# Altium PCB Mach_7x10_New.PcbDoc
Units mm, origin at the board's own origin, x right, y up, seen from the top; angles counter-clockwise.
Board outline 95 x 65 mm, 2 copper layers (Top Layer, Bottom Layer); 31 components, 26 nets, 107 pads, 0 vias.
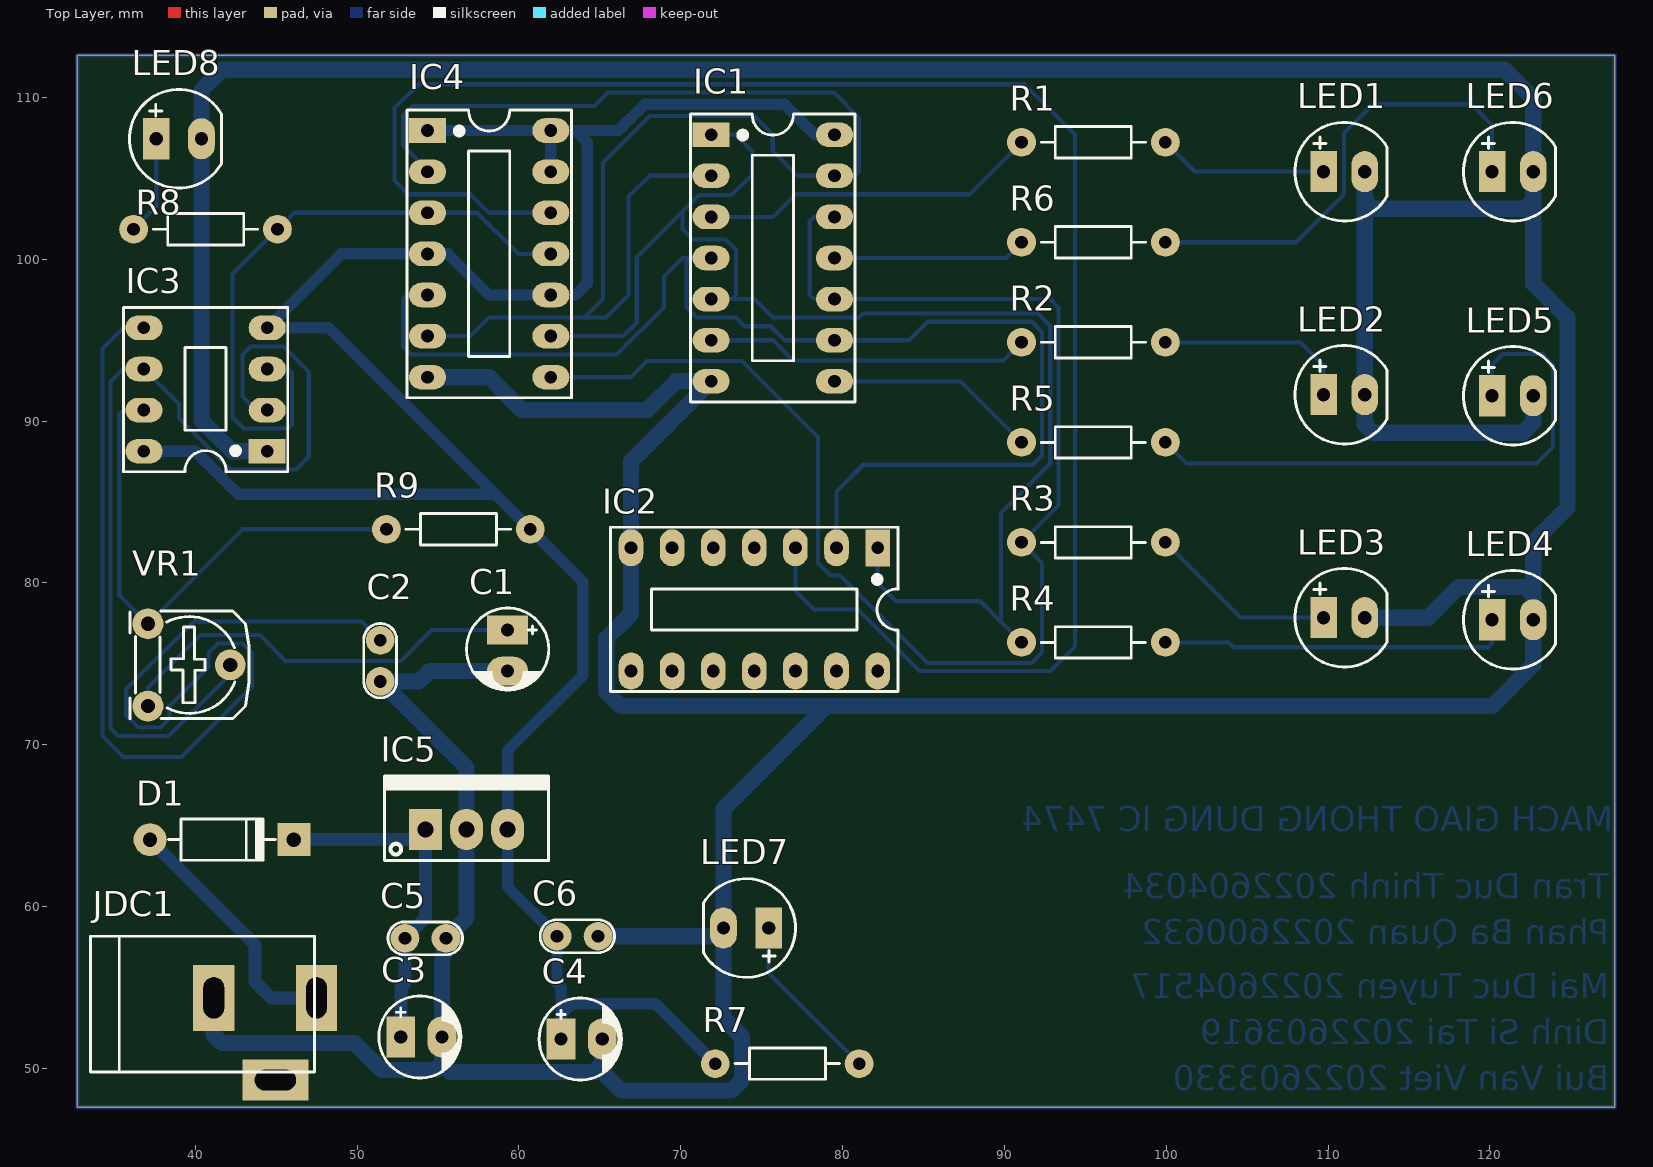
[diagram p0: Top Layer view]
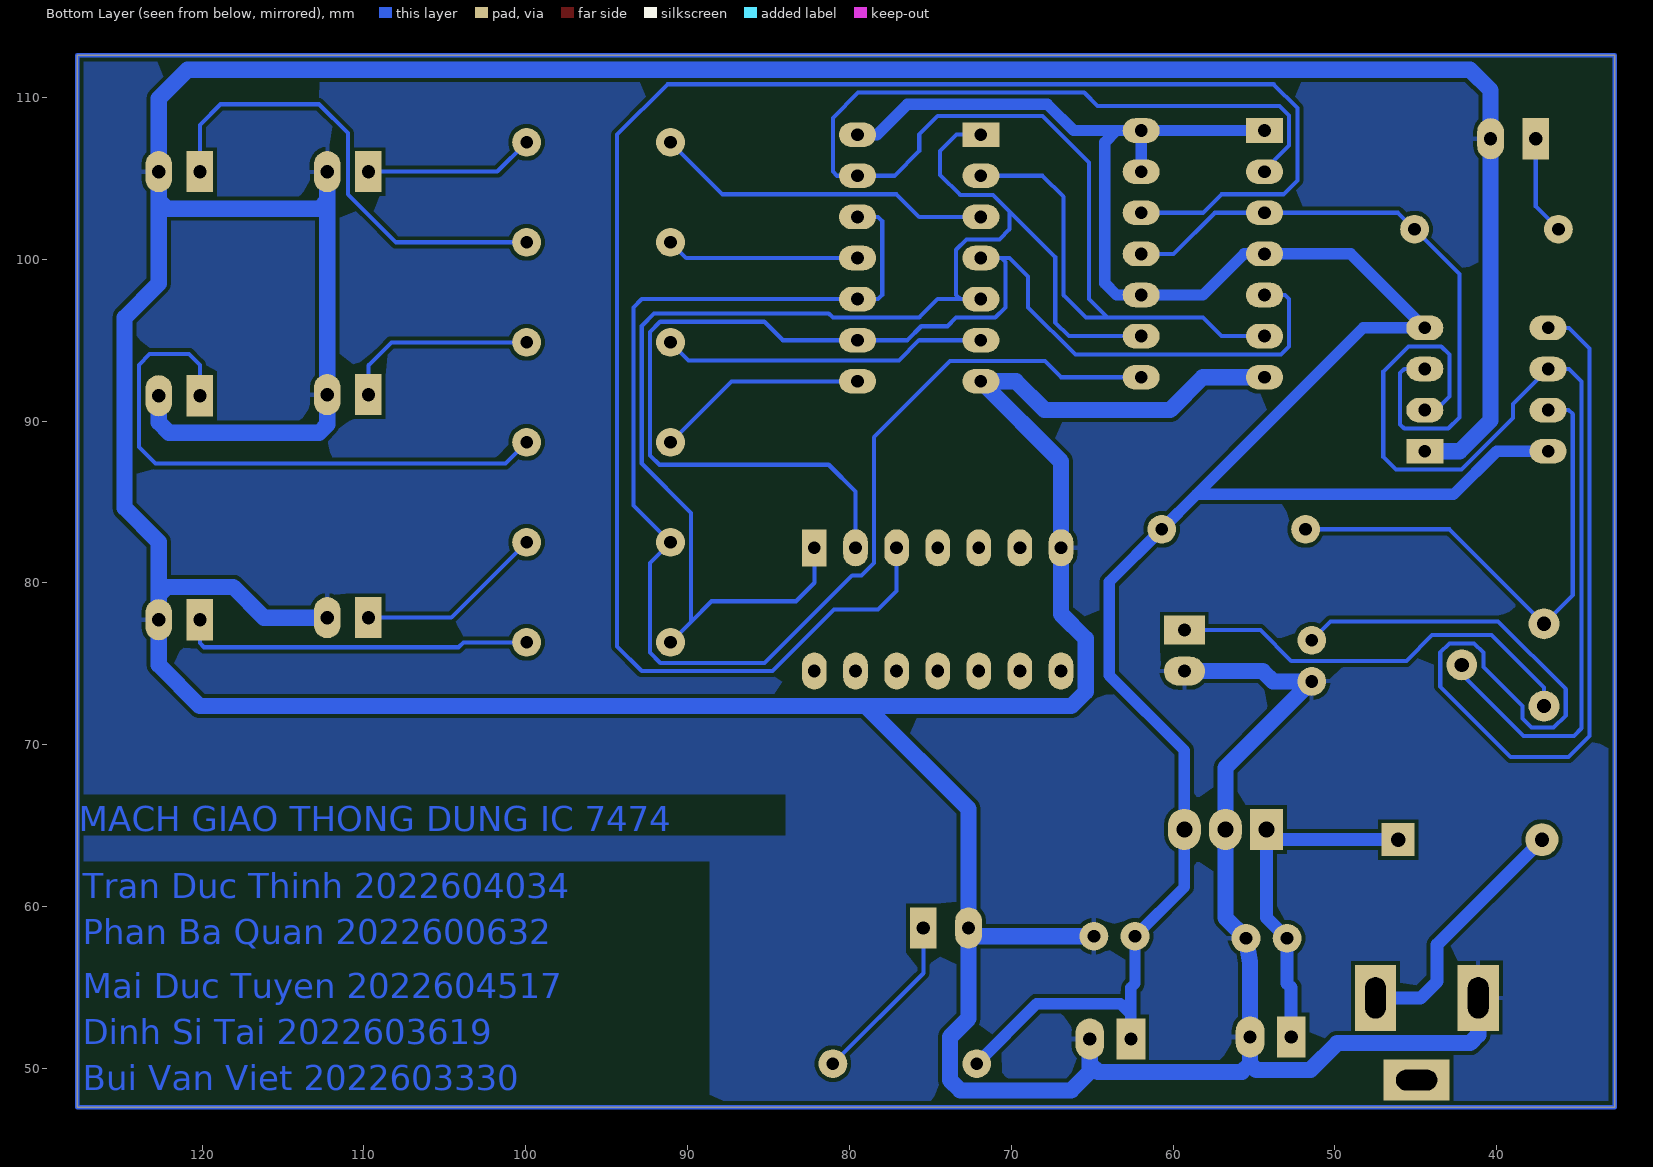
[diagram p1: Bottom Layer view, seen from below]
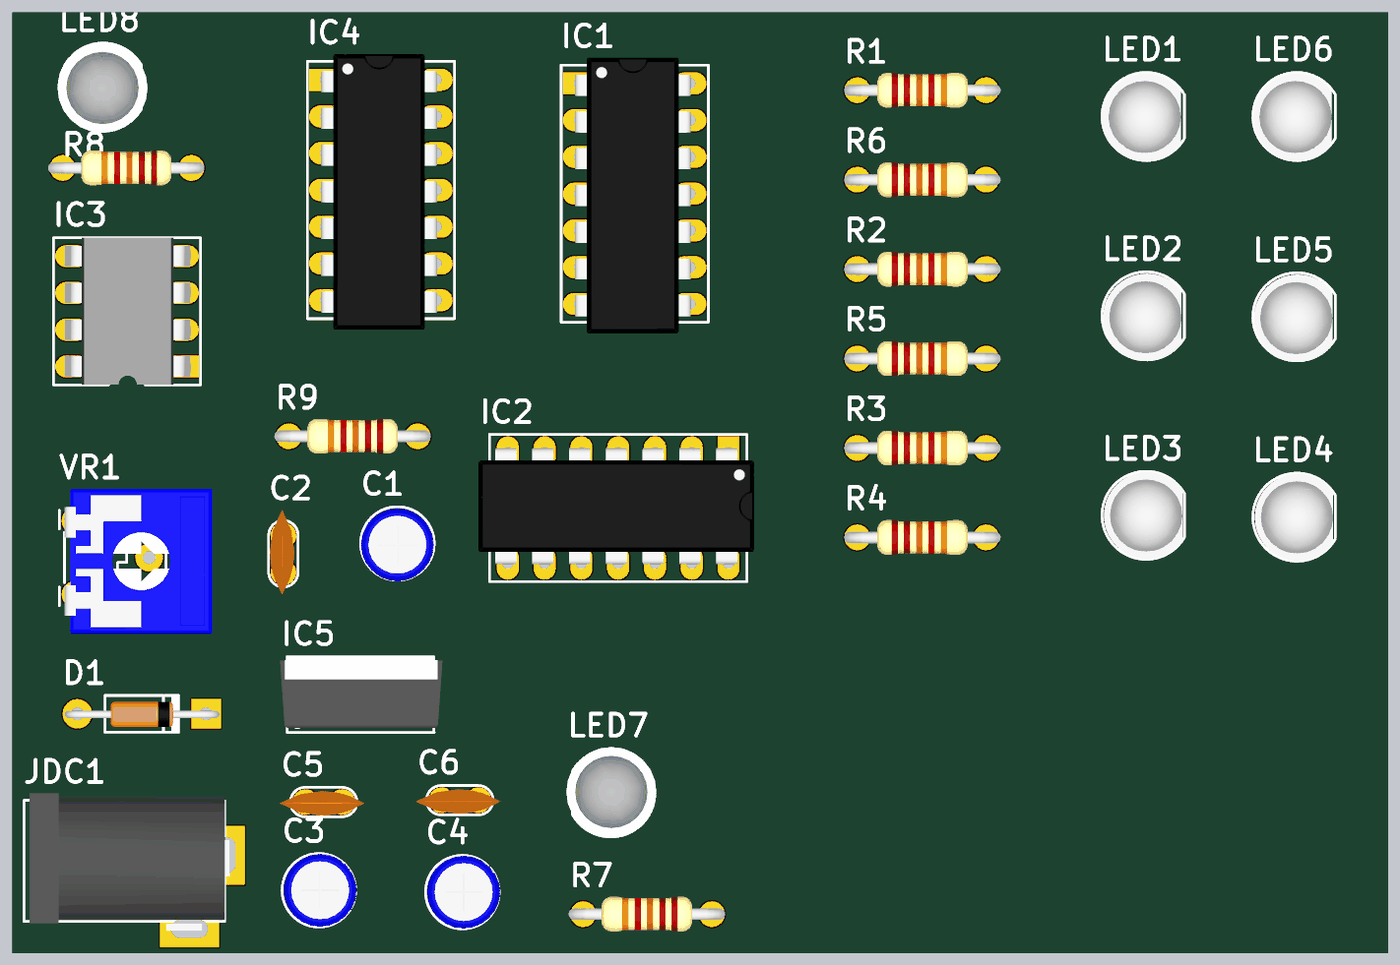
[diagram p2: 3D render of the assembled board from above, using the file's embedded part models]

## Layer stack, top to bottom
Top Solder: solder mask 0.0102, Solder Resist, Dk 3.5
Top Layer: signal copper 0.0356
Dielectric 1: dielectric 0.32, FR-4, Dk 4.8
Bottom Layer: signal copper 0.0356
Bottom Solder: solder mask 0.0102, Solder Resist, Dk 3.5

## Board outline
32.715,47.602 32.715,112.602 127.715,112.602 127.715,47.602

## Design rules (kind name [scope] priority, off if disabled: settings)
Clearance [All] p1: gap=0.254 ignorepadtopadclearanceinfootprint=FALSE
PolygonConnect [All] p1: connectstyle=Relief reliefconductorwidth=0.254 reliefentries=4 polygonreliefangle="90 Angle" airgapwidth=0.254
RoutingLayers [All] p1: top layer_v5=FALSE bottom layer_v5=TRUE
RoutingVias [All] p1: holewidth=0.711 width=1.27 viastyle="Through Hole" minholewidth=0.711 minwidth=1.27 maxholewidth=0.711 maxwidth=1.27
SolderMaskExpansion [All] p1: expansion=0.102 istentingtop=FALSE
SupplyNets "Schematic Supply Nets_2" [InNet('VCC')] p1: voltage=0.000
SupplyNets "Schematic Supply Nets_1" [InNet('+12')] p2: voltage=0.000
SupplyNets "Schematic Supply Nets" [InNet('GND')] p3: voltage=0.000
Width GND [InNet('GND')] p1: maxlimit=1 minlimit=1 preferedwidth=1
Width 12 [InNet('NetC3_1')] p2: maxlimit=0.8 minlimit=0.8 preferedwidth=0.8
Width 12V [InNet('+12')] p3: maxlimit=0.8 minlimit=0.8 preferedwidth=0.8
Width VCC [InNet('VCC')] p4: maxlimit=0.7 minlimit=0.7 preferedwidth=0.7
Width NET [All] p5: maxlimit=0.254 minlimit=0.254 preferedwidth=0.254
29 further rules are at their usual default settings.

## Classes and differential pairs
component class Nguyen_Ly: C1 C2 C3 C4 C5 C6 D1 IC1 IC2 IC3 IC4 IC5 JDC1 LED1 LED2 LED3 LED4 LED5 LED7 R1 R2 R3 R4 R5 R8 VR1

## Components (designator, comment, footprint, x,y, rotation, side; value= is the part's Value field where it differs from the comment)
C1 "10uF" CP1/2 59.309,77.089 r270 top value=10uF/50V
C2 "100pF" CN1 51.435,73.914 r90 top
C3 "10uF" CP1/2 52.705,51.943 r0 top value=10uF/50V
C4 "10uF" CP1/2 62.611,51.816 r0 top value=10uF/50V
C5 "100pF" CN1 55.499,58.039 r180 top
C6 "100pF" CN1 64.897,58.166 r180 top
D1 "1N4007" D1A 37.211,64.135 r180 top
IC1 "7408" DIP14/W0.3 71.882,107.696 r270 top
IC2 "7486" DIP14/W0.3 82.169,82.169 r180 top
IC3 "LM555" DIP8/W0.3 44.45,88.138 r90 top
IC4 "74LS74" DIP14/W0.3 54.356,107.95 r270 top
IC5 "LM7805" QTO-220 54.229,64.77 r0 top
JDC1 "Jac DC" DC-IN 44.323,51.816 r0 top
LED1 "LED" LED-5-Green 109.728,105.41 r0 top value="LED 3 ly Single Colour"
LED2 "LED" LED-5-Yellow 109.728,91.63 r0 top value="LED 3 ly Single Colour"
LED3 "LED" LED-5-RED 109.728,77.851 r0 top value="LED 3 ly Single Colour"
LED4 "LED" LED-5-RED 120.142,77.724 r0 top value="LED 3 ly Single Colour"
LED5 "LED" LED-5-Yellow 120.142,91.567 r0 top value="LED 3 ly Single Colour"
LED6 "LED" LED-5-Green 120.142,105.41 r0 top value="LED 3 ly Single Colour"
LED7 "LED" LED-5-WHITE 74.041,58.674 r180 top value="LED 3 ly Single Colour"
LED8 "LED" LED-5-WHITE 38.989,107.442 r0 top value="LED 3 ly Single Colour"
R1 "1k" R1/4W 99.949,107.226 r180 top value="R1/4W - 1K"
R2 "1k" R1/4W 99.949,94.866 r180 top value="R1/4W - 1K"
R3 "1k" R1/4W 99.949,82.507 r180 top value="R1/4W - 1K"
R4 "1k" R1/4W 99.949,76.327 r180 top value="R1/4W - 1K"
R5 "1k" R1/4W 99.949,88.687 r180 top value="R1/4W - 1K"
R6 "1k" R1/4W 99.949,101.046 r180 top value="R1/4W - 1K"
R7 "1k" R1/4W 72.136,50.292 r0 top value="R1/4W - 1K"
R8 "1k" R1/4W 36.195,101.854 r0 top value="R1/4W - 1K"
R9 "1k" R1/4W 51.816,83.312 r0 top value="R1/4W - 1K"
VR1 "10K" VR 37.084,77.47 r270 top value="VR 10K"

## Footprints (in the part's own frame and the unit in brackets; to place one, negate y for a bottom-side part, rotate by r counter-clockwise, add the part's x,y. Pads: shape width x height; smd on the part's side, far side on the other; paste and mask are expansions set on the pad)
CN1 [mil]
  round 70 hole 31: 1(0,0) 2(100,0)
  silkscreen extent -40,-40 141,40, body extent -60,-30 170,37, height 265
CP1/2 [mil] "Tu hoa < 22uF/16>50V"
  rect 70x100 hole 32: 1(0,0)
  oval 70x100 hole 32: 2(100,0)
  silkscreen extent -53,-100 146,100, body extent -49,-99 149,99, height 287
D1A [mil] "Diode 1A, W 100mil, L 350mil"
  round 80 hole 35: 1(0,0)
  rect 80x80 hole 35: 2(-350,0)
  silkscreen extent -305,-50 -45,50, body extent -386,-33 34,36, height 84
DC-IN [mil] "Jac DC input"
  rect 100x160 hole 50 slot 100 at 90 deg: 1(125,100) 2(-125,100)
  rect 160x100 hole 50 slot 100 at 0 deg: 3(25,-100)
  silkscreen extent -425,-80 120,250, body extent -410,-105 134,269, height 434
DIP8/W0.3 [mil] "8 PIN, W 300mil, Pin to pin 100mil"
  rect 60x90 hole 31: 1(0,0)
  oval 60x90 hole 31: 2(100,0) 3(200,0) 4(300,0) 5(300,300) 6(200,300) 7(100,300) 8(0,300)
  silkscreen extent -50,-50 350,350, body extent -50,-40 350,336, height 201
DIP14/W0.3 [mil] "14PIN, W 300mil, Pin to pin 100mil"
  rect 60x90 hole 31: 1(0,0)
  oval 60x90 hole 31: 2(100,0) 3(200,0) 4(300,0) 5(400,0) 6(500,0) 7(600,0) 8(600,300) 9(500,300) 10(400,300) 11(300,300) 12(200,300) 13(100,300) 14(0,300)
  silkscreen extent -50,-50 650,350, body extent -70,-12 680,302, height 145
LED-5-Green [mil] "LED 2 PIN, 5 ly , Only colour,pin to pin 100mil"
  rect 65x100 hole 32: 1(0,0)
  oval 65x100 hole 32: 2(100,0)
  silkscreen extent -70,-120 154,120, body extent -69,-120 145,117, height 339
LED-5-RED [mil] "LED 2 PIN, 5 ly , Only colour,pin to pin 100mil"
  rect 65x100 hole 32: 1(0,0)
  oval 65x100 hole 32: 2(100,0)
  silkscreen extent -70,-120 154,120, body extent -65,-119 149,118, height 339
LED-5-WHITE [mil] "LED 2 PIN, 5 ly , Only colour, pin to pin 110mil"
  rect 65x100 hole 32: 1(-55,0)
  oval 65x100 hole 32: 2(55,0)
  silkscreen extent -120,-120 104,120, body extent -124,-125 121,120, height 340
LED-5-Yellow [mil] "LED 2 PIN, 5 ly , Only colour,pin to pin 100mil"
  rect 65x100 hole 32: 1(0,0)
  oval 65x100 hole 32: 2(100,0)
  silkscreen extent -70,-120 154,120, body extent -67,-122 147,115, height 339
QTO-220 [mil] "TO-220 - 1-2-3"
  rect 80x100 hole 39: 1(0,0)
  oval 80x100 hole 39: 2(100,0) 3(200,0)
  silkscreen extent -100,-76 300,130, body extent -119,-64 322,121, height 755
R1/4W [mil] "R 1/4W, 2 Pin, 350mil"
  round 70 hole 31: 1(0,0) 2(350,0)
  silkscreen extent 48,-38 302,38, body extent -40,-47 386,47, height 111
VR [mil] "Resistor Variable"
  round 75 hole 35: 1(0,0) 2(100,200) 3(200,0)
  silkscreen extent -31,-44 231,246, body extent -87,-30 307,372, height 165

## Part data
C1 C3 C4: library part CP1, "Cap P  0,1uF < 22uF , 16 - 50V", Description 1="10 => 220uF/6,3V/10V - 10uF => 100uF/16V", Description 2="0,1uF => 33uF/50V - 10uF => 22uF/63V", Description 3="0,47uF => 10uF/100V"
C2 C5 C6: library part CN1, "Cap np  1pF - 472pF"
D1: library part D1A, "Diode 1A"
IC1: "Quad 2-Input AND Gate"
IC2: "Quad 2-Input XOR Gate", Copyright by=VanDungEvn@Gmail.com
IC3: "Timer"
IC4: library part 7474, "Dual D Flip-Flop", Copyright by=VanDungEvn@Gmail.com
IC5: library part LM78xx, "On ap +, from + 5 to + 24VDC"
JDC1: library part DCIN, "Jac DC input"
LED1 LED2 LED3 LED4 LED5 LED6 LED7 LED8: "LED Single colour Green and Red"
R1 R2 R3 R4 R5 R6 R7 R8 R9: library part R1/4W, "Resistor 1/4W"
VR1: library part VR, "Var Resistor"

## Nets (pads, with @x,y where several pads share a name; then routed paths per layer and width w, separated by ;. In a path a pad name is that pad's centre, name@x,y a point inside that pad or via, vN(x,y) a via of type N, cw(c..) or ccw(c..) an arc to the next point about the centre after c; other vN are vias at no path point)
+12: D1.1 JDC1.1 | length 15.7
  Bottom Layer w0.8: D1.1 43.688,57.658 43.688,55.372 44.704,54.356 JDC1.1
GND: C1.2 C2.1 C3.2 C4.2 C5.1 C6.1 IC1.7 IC2.7 IC3.1 IC4.7 IC5.2 JDC1.2 LED1.2 LED2.2 LED3.2 LED4.2 LED5.2 LED6.2 LED7.2 LED8.2 | length 403.1
  Bottom Layer w1: JDC1.2 41.148,52.07 41.656,51.562 49.86,51.562 51.511,49.911 54.864,49.911 55.245,50.292 ; IC3.1 42.291,88.138 40.386,90.043 LED8.2 40.386,110.439 41.656,111.709 120.904,111.709 122.682,109.931 LED6.2 122.682,103.632 ; IC4.7 58.166,92.71 60.19,90.686 67.945,90.686 69.715,92.456 IC1.7 66.929,87.503 IC2.7 66.929,78.08 65.405,76.556 65.405,73.279 66.294,72.39 78.867,72.39 120.142,72.39 122.682,74.93 LED4.2 122.682,79.248 ; C1.2 54.467,74.549 53.832,73.914 C2.1 56.769,68.58 IC5.2 56.769,59.309 C5.1 55.245,56.54 C3.2 55.245,50.292 ; C6.1 LED7.2@72.644,58.166 ; C4.2 65.151,50.292 ; 78.867,72.263 72.644,66.04 LED7.2 LED7.2@72.644,58.166 ; LED3.2 116.18,77.851 118.085,79.756 122.174,79.756 122.682,79.248 ; LED1.2 112.268,103.632 ; LED5.2 122.682,89.916 122.047,89.281 112.776,89.281 112.268,89.789 LED2.2 112.268,103.632 ; 55.245,50.292 55.753,49.784 64.643,49.784 65.151,50.292 ; 65.151,50.292 65.151,49.784 66.294,48.641 73.152,48.641 73.787,49.276 73.787,51.943 72.644,53.086 LED7.2@72.644,58.166 ; 112.268,103.632 112.776,103.124 122.174,103.124 122.682,103.632 ; 122.682,79.248 122.682,82.525 124.79,84.633 124.79,96.393 122.682,98.501 122.682,103.632
NetC1_1: C1.1 VR1.3 | length 26.2
  Bottom Layer w0.254: VR1.3 37.084,73.533 40.322,76.772 44.005,76.772 45.593,75.184 52.705,75.184 54.61,77.089 C1.1
NetC2_2: C2.2 IC3.5 | length 71.7
  Bottom Layer w0.254: IC3.5 35.535,95.758 34.265,94.488 34.265,70.536 35.56,69.24 39.141,69.24 43.497,73.596 43.497,75.692 42.926,76.263 41.402,76.263 40.831,75.692 40.831,74.803 38.417,72.39 38.417,71.628 37.846,71.056 36.487,71.056 35.738,71.806 35.738,73.431 39.929,77.622 50.267,77.622 C2.2
NetC3_1: C3.1 C5.2 D1.2 IC5.1 | length 21.6
  Bottom Layer w0.8: D1.2 IC5.1@54.229,64.135 ; C3.1 52.705,54.991 52.959,55.245 C5.2 54.229,59.309 IC5.1@54.229,64.135 ; IC5.1 IC5.1@54.229,64.135
NetIC1_1: IC1.1 IC1.5 IC2.1 IC4.9 R4.2 | length 85.4
  Bottom Layer w0.254: IC4.9 66.446,95.25 67.288,96.091 67.288,100.13 70.104,102.946 ; IC1.5 73.152,97.536 ; IC1.1 73.152,107.696 73.381,107.696 74.397,106.68 74.397,105.207 73.152,103.962 72.72,103.962 71.12,103.962 70.104,102.946 ; IC2.1 82.169,80.01 83.312,78.867 88.519,78.867 89.789,77.597 ; R4.2 89.789,77.597 ; 70.104,102.946 70.104,101.854 70.739,101.219 72.771,101.219 73.406,100.584 73.406,97.79 73.152,97.536 ; 73.152,97.536 74.549,97.536 75.692,96.393 81.026,96.393 81.28,96.647 92.075,96.647 92.837,95.885 92.837,87.376 89.789,84.328 89.789,77.597
NetIC1_2: IC1.2 IC1.13 IC4.2 IC4.6 | length 91.4
  Bottom Layer w0.254: IC4.6 57.023,95.25 58.166,96.393 64.059,96.393 ; IC4.2 54.319,105.41 53.732,105.997 53.732,106.13 52.832,107.03 52.832,108.87 53.436,109.474 64.665,109.474 65.492,110.301 79.462,110.301 81.026,108.737 81.026,105.41 80.772,105.156 IC1.13 77.216,105.156 75.692,106.68 75.692,107.696 74.549,108.839 68.072,108.839 65.202,105.969 65.202,97.536 64.059,96.393 ; IC1.2 68.072,105.156 66.78,103.864 66.78,97.777 65.396,96.393 64.059,96.393
NetIC1_3: IC1.3 R1.2 | length 21.1
  Bottom Layer w0.254: IC1.3 75.692,102.616 77.089,104.013 87.846,104.013 R1.2
NetIC1_4: IC1.4 IC1.9 IC2.2 IC4.5 | length 78.8
  Bottom Layer w0.254: IC4.5 53.086,97.79 52.832,97.536 52.832,94.615 53.34,94.107 66.04,94.107 68.961,97.028 68.961,98.933 70.104,100.076 70.612,100.076 ; IC1.4 70.612,100.076 ; IC2.2 79.629,85.649 81.28,87.3 91.745,87.3 92.329,87.884 92.329,95.504 91.694,96.139 85.268,96.139 84.125,94.996 IC1.9 76.429,94.996 75.565,95.86 73.939,95.86 73.406,96.393 70.993,96.393 70.358,97.028 70.358,99.822 70.612,100.076
NetIC1_6: IC1.6 R2.2 | length 20.2
  Bottom Layer w0.254: IC1.6 75.692,94.996 76.937,93.751 89.944,93.751 R2.2
NetIC1_8: IC1.8 R5.2 | length 13.1
  Bottom Layer w0.254: IC1.8 87.29,92.456 R5.2
NetIC1_10: IC1.10 IC1.12 IC4.8 R3.2 | length 88
  Bottom Layer w0.254: IC4.8 66.929,92.71 67.92,93.701 73.787,93.701 78.486,89.002 78.486,81.229 79.248,80.467 79.832,80.467 85.242,75.057 91.694,75.057 92.329,75.692 92.329,81.237 R3.2 93.345,84.793 93.345,97.028 92.837,97.536 IC1.10 78.232,97.536 77.978,97.79 77.978,102.362 78.232,102.616 IC1.12
NetIC1_11: IC1.11 R6.2 | length 12
  Bottom Layer w0.254: IC1.11 90.089,100.076 R6.2
NetIC2_3: IC2.3 IC4.12 | length 113.1
  Bottom Layer w0.254: IC4.12 58.166,102.87 57.023,104.013 53.188,104.013 52.324,104.877 52.324,109.347 53.786,110.809 91.248,110.809 94.361,107.696 94.361,76.073 92.837,74.549 84.76,74.549 80.95,78.359 78.232,78.359 77.089,79.502 IC2.3
NetIC3_2: IC3.2 IC3.6 VR1.2 | length 61.8
  Bottom Layer w0.254: VR1.2 41.848,74.614 41.848,74.043 38.354,70.549 35.242,70.549 34.773,71.018 34.773,92.456 35.535,93.218 IC3.6 38.989,91.059 38.989,90.194 42.188,86.995 46.228,86.995 47.015,87.782 47.015,93.066 45.466,94.615 43.434,94.615 42.926,94.107 42.926,91.516 43.764,90.678 IC3.2
NetIC3_3: IC3.3 IC4.3 IC4.11 R8.2 | length 40
  Bottom Layer w0.254: IC3.3 45.72,93.218 45.974,92.964 45.974,89.789 45.72,89.535 43.002,89.535 42.316,90.221 42.316,99.085 R8.2 46.101,102.87 IC4.3 57.429,102.87 59.969,100.33 IC4.11
NetIC3_7: IC3.7 R9.1 VR1.1 | length 32.5
  Bottom Layer w0.254: IC3.7 35.56,90.678 35.306,90.424 35.306,79.248 VR1.1 42.926,83.312 R9.1
NetLED1_1: LED1.1 R1.1 | length 10.5
  Bottom Layer w0.254: R1.1 101.765,105.41 LED1.1
NetLED2_1: LED2.1 R2.1 | length 12.2
  Bottom Layer w0.254: R2.1 108.308,94.866 109.728,93.447 LED2.1
NetLED3_1: LED3.1 R3.1 | length 11.7
  Bottom Layer w0.254: R3.1 104.605,77.851 LED3.1
NetLED4_1: LED4.1 R4.1 | length 21.9
  Bottom Layer w0.254: R4.1 103.861,76.327 104.165,76.022 119.888,76.022 120.142,76.276 LED4.1
NetLED5_1: LED5.1 R5.1 | length 36.2
  Bottom Layer w0.254: R5.1 101.26,87.376 122.885,87.376 123.901,88.392 123.901,93.472 123.241,94.132 120.802,94.132 120.142,93.472 LED5.1
NetLED6_1: LED6.1 R6.1 | length 29.4
  Bottom Layer w0.254: R6.1 108.031,101.046 110.998,104.013 110.998,107.798 112.776,109.576 118.872,109.576 120.142,108.306 LED6.1
NetLED7_1: LED7.1 R7.2 | length 10.7
  Bottom Layer w0.254: LED7.1 75.438,55.88 R7.2
NetLED8_1: LED8.1 R8.1 | length 6.2
  Bottom Layer w0.254: R8.1 37.592,103.251 LED8.1
VCC: C4.1 C6.2 IC1.14 IC3.4 IC3.8 IC4.1 IC4.4 IC4.10 IC4.13 IC4.14 IC5.3 R7.1 R9.2 | length 153.6
  Bottom Layer w0.7: IC3.8 40.005,88.138 42.672,85.471 58.547,85.471 ; IC4.1 IC4.14 ; IC4.13 IC4.14 ; C4.1 62.611,53.34 ; R7.1 68.428,54 63.271,54 62.611,53.34 ; IC1.14 78.303,107.696 76.429,109.57 67.762,109.57 66.142,107.95 63.5,107.95 ; 58.547,85.471 48.26,95.758 IC3.4 49.022,100.33 IC4.4 55.626,100.33 58.166,97.79 IC4.10 63.5,97.79 64.231,98.521 64.231,107.219 63.5,107.95 ; 58.547,85.471 R9.2 63.957,80.061 63.957,74.295 59.309,69.647 IC5.3 59.309,61.214 C6.2 62.357,55.245 62.611,54.991 62.611,53.34 ; IC4.14 63.5,107.95
pads on no net: IC2.4 IC2.5 IC2.6 IC2.8 IC2.9 IC2.10 IC2.11 IC2.12 IC2.13 IC2.14 JDC1.3
copper on no net: | length 320
  Bottom Layer w0.254: 32.715,47.602 127.715,47.602 127.715,112.602 32.715,112.602 32.715,47.602

## Polygon pours and split planes (outlines as drawn)
GND on Bottom Layer "NONET_L-01_P-001" (solid, remove dead copper, pour order 0): 32.766,47.625 32.766,112.522 127.635,112.522 127.635,47.625

## Other copper
Bottom Layer:
  text "MACH GIAO THONG DUNG IC 7474" at 127.635,64.643 h1.52
  text "Tran Duc Thinh 2022604034" at 127.381,60.528 h1.52
  text "Phan Ba Quan 2022600632" at 127.381,57.683 h1.52
  text "Mai Duc Tuyen 2022604517" at 127.381,54.331 h1.52
  text "Dinh Si Tai 2022603619" at 127.381,51.486 h1.52
  text "Bui Van Viet 2022603330" at 127.381,48.641 h1.52